# EAGLE board mff2-to-4ffnano-left v1.0 (EAGLE 9.6.2)
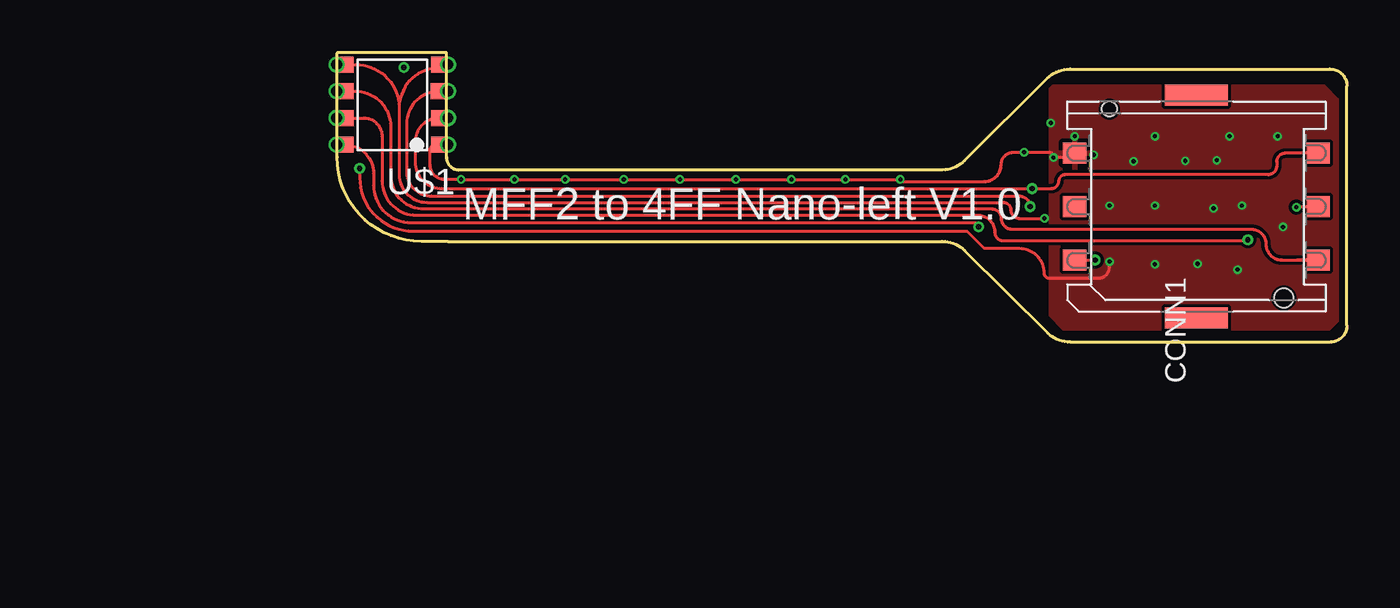
[diagram p0: board, top side]
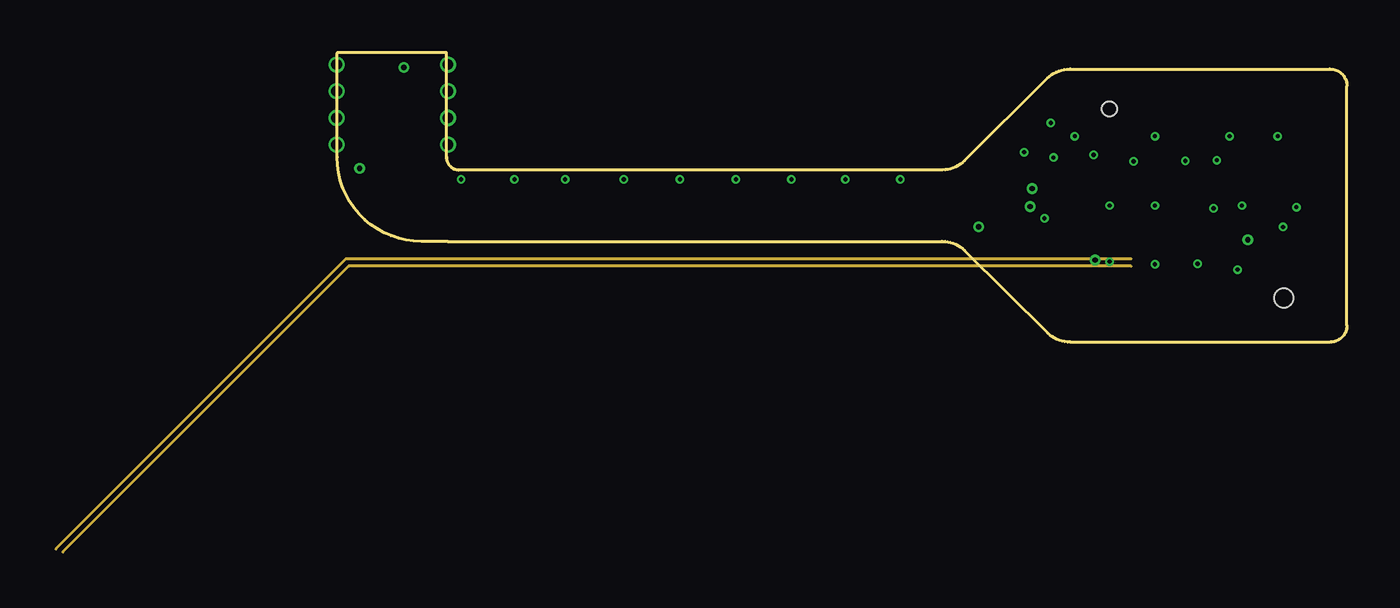
[diagram p1: board, inner layer L2-SIGNAL]
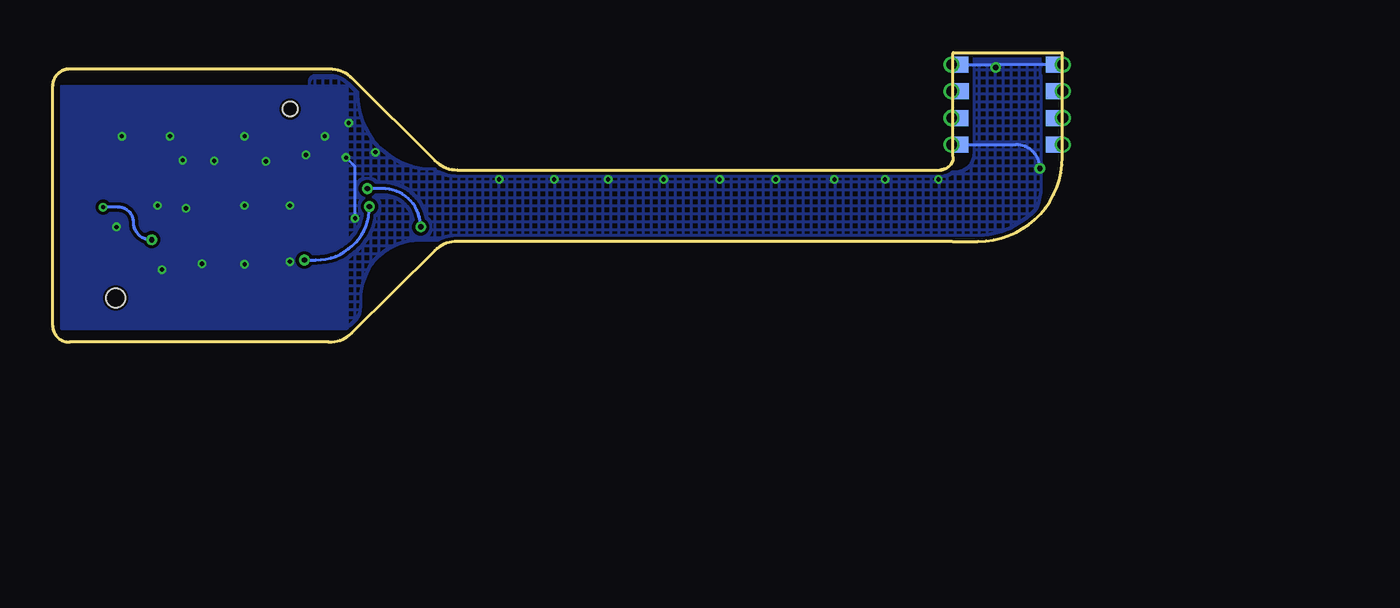
[diagram p2: board, bottom side, seen from below]

Size 48.06 x 13.79 mm. Coordinates in mm from the lower left corner, seen from the top.
Outline: 0,8.83 0,13.75
Outline: 5.2,13.79 0,13.79
Outline: 5.73,8.2 28.8,8.2 arc45 29.86,8.64 33.8,12.56 arc-45 34.86,13 34.9,13 47.22,13 47.26,13 arc-90 48.06,12.2 48.06,0.8 arc-90 47.26,0 47.22,0 34.92,0 34.89,0 arc-44 33.82,0.43 29.86,4.37 arc44 28.8,4.8 28.76,4.8 5.26,4.8
Outline: 5.2,8.83 5.2,13.75
Outline: 5.23,4.8 4.01,4.8 arc-90 0,8.81
Outline: 5.2,8.83 arc90 5.79,8.2 5.81,8.2
Copper layers (1*16): L1-TOP 0.035mm / dielectric 0.1mm / L6-BOTTOM 0.035mm
Design rules "particle-6layer *": minimum track width 4mil, minimum drill 0.1mm, track to track 6mil, track to pad 6mil, pad to pad 6mil, via to via 6mil, smd to smd 0mil, copper to edge 6mil, drill to drill 6mil, minimum pad ring 4mil, minimum via ring 4mil, stop-mask expansion 0mil, vias tented up to drill 20mil, thermal gap 8mil
Net classes: 1 DIFF_PAIR: width 0.203 mm, clearance 0.203 mm; 2 RF: width 0.203 mm, clearance 0.257 mm; 3 usb_lay3: width 0.152 mm, clearance 0.191 mm; 4 3V3: width 0.305 mm, clearance 0.508 mm; 5 USB_top: width 0.406 mm, drill 0.2 mm, clearance 0.152 mm; 6 +3V3: width 0.203 mm, clearance 0.152 mm; 7 PMID: width 0.305 mm, clearance 0.508 mm

## Footprints (pad centres in the part's own frame; a part is rotated, then mirrored left to right if it is on the bottom)
GCT-SIM8100 = smd 1 x 1.1: C1 2.54,-5.8; C2 0,-5.8; C3 -2.54,-5.8; C5 2.54,5.8; C6 0,5.8; C7 -2.54,5.8 | smd 1 x 3: NC@1 -5.3,0; NC@2 5.3,0 | hole 0.7: 4.65,4.15 | hole 0.9: -4.35,-4.15
MFF2 = smd 0.8 x 0.76 bottom: 1 -2.245,1.895; 2 -2.245,0.625; 3 -2.224,-0.645; 4 -2.245,-1.915; 5 2.245,-1.915; 6 2.245,-0.645; 7 2.245,0.625; 8 2.245,1.905 | smd 0.8 x 0.76: 9 -2.245,1.895; 10 -2.245,0.625; 11 -2.224,-0.645; 12 -2.245,-1.915; 13 2.245,-1.915; 14 2.245,-0.645; 15 2.245,0.625; 16 2.245,1.905 | drill 0.51 pad 0.76: P$6 -2.65,1.893; P$7 -2.65,0.623; P$8 -2.65,-0.647; P$9 -2.65,-1.917; P$10 2.65,-1.917; P$11 2.65,-0.647; P$12 2.65,0.623; P$13 2.65,1.893

## Placement (x,y rotation side)
CONN1  SIM-NANO-4FF  [GCT-SIM8100]  40.9,6.45 90 top
U$1  ESIM  [MFF2]  2.62,11.3 180 top

## Library data of the parts
CONN1 = Particle
U$1 = mff2-to-4ffnano

## Nets
GND: CONN1.C5 U$1.1 U$1.4 U$1.5 U$1.9 U$1.12 U$1.13 U$1.P$6 U$1.P$9 U$1.P$10
SIM_CLK: CONN1.C3 U$1.6 U$1.14 U$1.P$11
SIM_DATA: CONN1.C7 U$1.3 U$1.11 U$1.P$8
SIM_RST: CONN1.C2 U$1.7 U$1.15 U$1.P$12
SIM_VCC: CONN1.C1 U$1.2 U$1.8 U$1.10 U$1.16 U$1.P$7 U$1.P$13

## Tracks (layer width: path | path; a pad name or v marks a point on that pad's centre or on a via)
GND  (via drill 0.2 pad 0.4, 0.25 pad 0.51)
  L1-TOP 0.152: CONN1.C5 34.9,8.79 34.12,8.79 | 34.12,8.79 v34.09,8.79 | U$1.13 | U$1.P$6 U$1.9 4.68,9.41 arc90 4.43,9.15 4.43,8.43 arc90 5.11,7.75 v5.9,7.75 | U$1.12 U$1.P$9 U$1.12 arc90 U$1.12 | 5.87,7.77 arc-90 v5.9,7.75 | v5.9,7.75 v8.44,7.75 v10.85,7.75 v13.65,7.75 v16.31,7.75 v18.98,7.75 v21.62,7.75 v24.19,7.75 v26.8,7.75 arc90 26.9,7.64 30.79,7.64 arc90 31.6,8.46 arc-90 32.19,9.04 v32.7,9.04 33.86,9.04 arc-90 34.12,8.79 | U$1.12 4.87,13.06 arc90 2.95,11.15 | 2.95,11.15 2.95,7.98 arc90 4.27,6.65 31.71,6.65 arc-90 32.06,6.3 arc90 32.47,5.89 v33.66,5.89 | v1.07,8.28 1.07,7.82 arc90 3.61,5.28 29.98,5.28 30.79,4.47 32.47,4.47 arc-90 33.64,3.3 arc90 33.89,3.05 36.23,3.05 arc90 36.76,3.58 v36.76,3.83 | U$1.13 0.88,13.22 arc-90 2.95,11.15 | U$1.13 arc90 U$1.13 | U$1.13 U$1.P$10
  L6-BOTTOM 0.152: v33.66,5.89 33.66,8.36 v34.09,8.79 | U$1.13 | U$1.P$9 U$1.12 3.32,13.22 arc90 v3.18,13.08 arc90 3.05,13.22 U$1.13 | U$1.P$10 U$1.13 | U$1.9 | U$1.9 2.2,9.41 arc90 v1.07,8.28 | U$1.9 arc-90 U$1.9 | U$1.9 arc-90 U$1.9 | U$1.9 U$1.P$6 arc-90 U$1.P$6 U$1.9
  other vias: 36,8.92 35.11,9.8 38.92,9.8 42.47,9.8 38.92,3.71 42.86,3.45 38.92,6.5 41.71,6.38 45.01,5.49 44.76,9.8 36.76,6.5 33.97,10.44 37.9,8.61 40.37,8.64 43.06,6.5 41.87,8.66 40.95,3.73
  pour L1-TOP: 33.91,12.06 33.91,1.27 34.55,0.63 47.25,0.63 47.63,1.02 47.63,11.56 47,12.19 34.04,12.19
  pour L6-BOTTOM (no thermals): 34.04,12.19 34.04,0.63 35.44,0.63 47.63,0.63 47.63,0.76 47.63,12.19
  pour L6-BOTTOM (hatched): 0.89,13.59 arc-90 1.02,13.46 1.02,7.37 arc90 3.56,4.83 5.59,4.83 30.61,4.83 arc-90 33.41,2.03 33.41,1.65 arc90 34.42,0.63 35.57,0.63 arc90 35.82,0.89 35.82,12.19 35.82,12.45 arc90 35.57,12.7 34.42,12.7 arc90 33.53,11.81 arc-90 29.98,8.26 29.85,8.26 arc-90 29.72,8.13 5.72,8.13 5.09,8.13 arc-90 4.2,9.02 4.2,13.59
MCU_USB_N
  L2-SIGNAL 0.152: 37.78,3.62 0.55,3.62 -13.05,-9.98
MCU_USB_P
  L2-SIGNAL 0.152: 37.78,3.96 0.41,3.96 -13.39,-9.84
SIM_CLK
  L1-TOP 0.152: 45.67,3.91 CONN1.C3 44.96,3.91 arc-90 44.2,4.67 arc90 43.49,5.38 32.11,5.38 arc-90 31.6,5.89 arc90 31.15,6.35 4.12,6.35 arc-90 2.55,7.93 2.55,10.26 arc90 0.86,11.95 U$1.14 | U$1.14 | U$1.14 arc90 U$1.14 | U$1.14 U$1.P$11
  L6-BOTTOM 0.152: U$1.P$11 U$1.14
SIM_DATA  (via drill 0.25 pad 0.51)
  L1-TOP 0.152: U$1.P$8 U$1.11 arc90 3.31,10.41 3.31,8.13 arc90 4.48,6.96 32.47,6.96 arc-90 v32.97,6.45 | CONN1.C7 v36.07,3.91
  L6-BOTTOM 0.152: U$1.11 U$1.P$8 | v36.07,3.91 35.52,3.91 arc-90 v32.97,6.45
SIM_RST  (via drill 0.2 pad 0.4, 0.25 pad 0.51)
  L1-TOP 0.152: CONN1.C2 46.67,6.43 v45.65,6.43 | U$1.15 | U$1.15 1.27,10.68 arc-90 2.14,9.8 2.14,7.67 arc90 3.77,6.04 30.49,6.04 arc-90 31.3,5.23 arc90 31.71,4.83 43.29,4.83 arc90 v43.34,4.88 | U$1.15 arc90 U$1.15 | U$1.15 arc90 U$1.15 | U$1.15 arc90 U$1.15 | U$1.15 U$1.P$12
  L6-BOTTOM 0.152: U$1.15 U$1.15 arc90 U$1.15 | v43.34,4.88 43.39,4.88 arc90 44.2,5.69 arc-90 44.94,6.43 v45.65,6.43 | U$1.P$12 U$1.15
SIM_VCC  (via drill 0.25 pad 0.51)
  L1-TOP 0.152: U$1.16 0.23,9.4 | 0.37,9.41 U$1.16 | U$1.P$7 | U$1.10 arc90 3.71,9.52 3.71,8.58 arc90 4.98,7.31 v33.08,7.31 33.99,7.31 arc90 34.35,7.67 arc-90 34.65,7.98 44.3,7.98 arc90 44.71,8.38 44.71,8.58 arc-90 45.12,8.99 CONN1.C1 | U$1.16 arc-90 1.73,8.04 1.73,7.47 arc90 3.51,5.69 30.33,5.69 arc-90 v30.54,5.49 | -0.02,9.4 arc-90 U$1.P$13 | -0.02,9.4 arc-90 U$1.P$13 | U$1.10 arc-90 U$1.10 U$1.P$7 | U$1.16 -0.02,9.4 | -0.02,9.4 arc-90 U$1.P$13 | U$1.P$13 0.37,9.41 | 0.37,9.41 arc-90 U$1.16 | U$1.10 U$1.P$7 | U$1.P$7 arc90 U$1.P$7
  L6-BOTTOM 0.152: U$1.P$7 | U$1.P$7 U$1.10 arc90 U$1.10 U$1.P$7 | U$1.P$7 arc90 U$1.P$7 | U$1.P$13 0.37,9.41 arc-90 U$1.16 | U$1.P$7 arc90 U$1.P$7 | v30.54,5.49 arc-90 32.37,7.31 v33.08,7.31

## Text on the board
tPlace: MFF2 to 4FF Nano-left V1.0